# EAGLE board class ab (EAGLE 9.6.2)
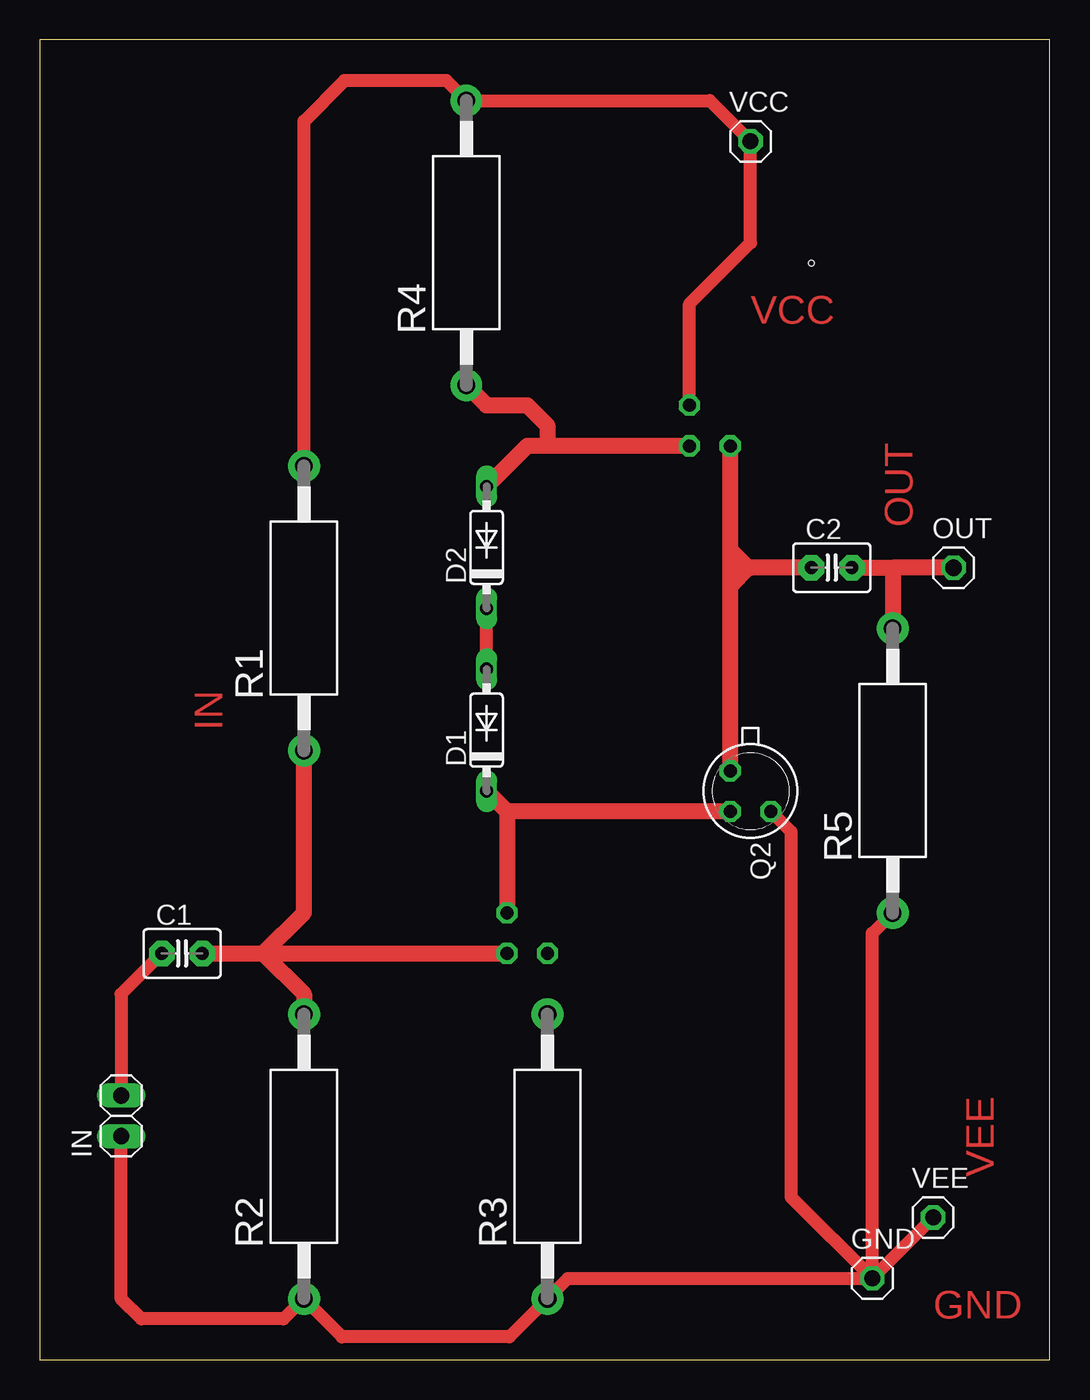
[diagram p0: board, top side]
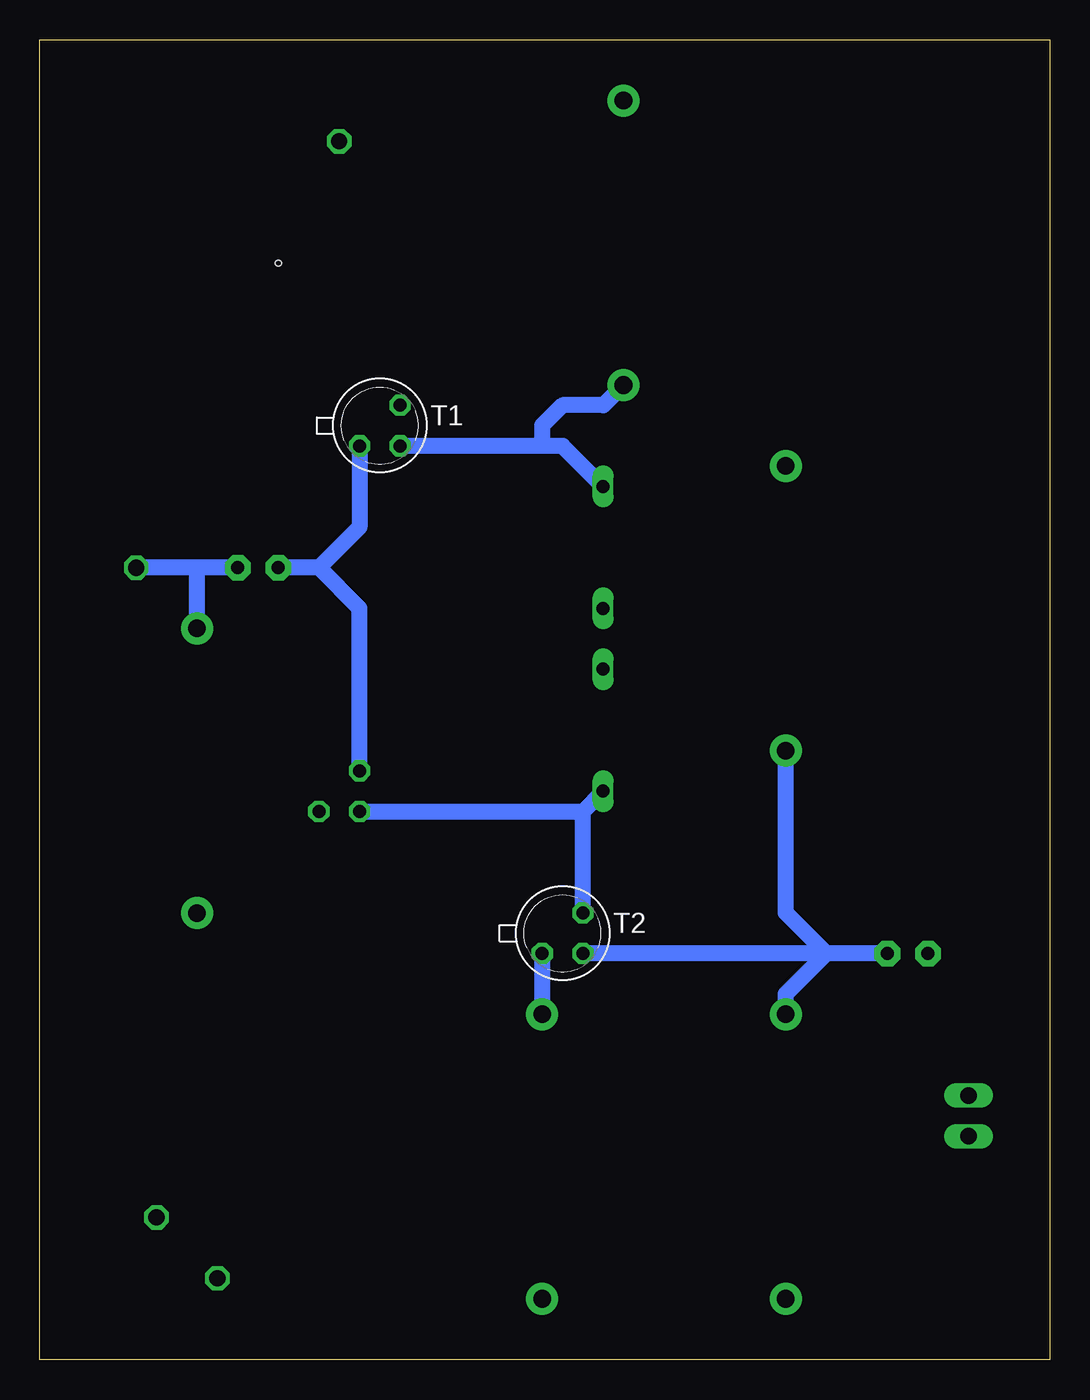
[diagram p1: board, bottom side, seen from below]

Size 63.17 x 82.54 mm. Coordinates in mm from the lower left corner, seen from the top.
Outline: 0,0 63.17,0 63.17,82.54 0,82.54 0,0
Copper layers (1*16): Top 0.035mm / dielectric 1.5mm / Bottom 0.035mm
Design rules "default": minimum track width 6mil, minimum drill 0.35mm, track to track 6mil, track to pad 6mil, pad to pad 6mil, via to via 6mil, smd to smd 6mil, copper to edge 40mil, drill to drill 6mil, minimum pad ring 10mil, minimum via ring 8mil, stop-mask expansion 4mil, vias tented up to drill 0mil, thermal gap 10mil
Holes 0.35 mm at 48.26,68.58

## Footprints (pad centres in the part's own frame; a part is rotated, then mirrored left to right if it is on the bottom)
C2.5-3 = drill 0.813 pad 1.6 octagon: 1 -1.27,0; 2 1.27,0
DO35-7 = drill 0.813 long: A 3.81,0; C -3.81,0
1X01 = drill 1.016 octagon: 1 0,0
1X02 = drill 1.016 long: 1 -1.27,0; 2 1.27,0
TO18 = drill 0.813 octagon: 1 -1.27,-1.27; 2 1.27,-1.27; 3 1.27,1.27
AC01 = drill 1.1 pad 2: 1 -8.9,0; 2 8.9,0

## Placement (x,y rotation side)
C1  [C2.5-3]  8.89,25.4 0 top
C2  [C2.5-3]  49.53,49.53 0 top
D1  1N4148DO35-7  [DO35-7]  27.94,39.37 90 top
D2  1N4148DO35-7  [DO35-7]  27.94,50.8 90 top
GND  [1X01]  52.07,5.08 0 top
IN  [1X02]  5.08,15.24 90 top
OUT  [1X01]  57.15,49.53 0 top
Q2  2N2907  [TO18]  44.45,35.56 270 top
R1  [AC01]  16.51,46.99 90 top
R2  [AC01]  16.51,12.7 90 top
R3  [AC01]  31.75,12.7 90 top
R4  [AC01]  26.67,69.85 90 top
R5  [AC01]  53.34,36.83 90 top
T1  2N2222  [TO18]  41.91,58.42 0 bottom
T2  2N2222  [TO18]  30.48,26.67 0 bottom
VCC  [1X01]  44.45,76.2 0 top
VEE  [1X01]  55.88,8.89 0 top

## Library data of the parts
C1 C2 = capacitor-wima
D1 D2 = diode
GND IN OUT VCC VEE = pinhead
Q2 = transistor-pnp
R1-R5 = resistor-power; OC_FARNELL: unknown; OC_NEWARK: unknown
T1 T2 = transistor

## Nets
GND: GND.1 IN.1 Q2.3 R2.1 R3.1 R5.1 VEE.1
N$1: C1.2 R1.1 R2.2 T2.2
N$2: D1.C Q2.2 T2.3
N$3: D1.A D2.C
N$4: D2.A R4.1 T1.2
N$5: R3.2 T2.1
N$8: C2.1 Q2.1 T1.1
N$9: C1.1 IN.2
N$10: C2.2 OUT.1 R5.2
VCC: R1.2 R4.2 T1.3 VCC.1

## Tracks (layer width: path | path; a pad name or v marks a point on that pad's centre or on a via)
GND
  Top 0.813: GND.1 VEE.1 | GND.1 52.07,26.66 R5.1 | Q2.3 46.99,33.02 46.99,10.16 GND.1 | GND.1 33.03,5.08 R3.1 29.37,1.42 18.89,1.42 R2.1 15.24,2.54 6.35,2.54 5.08,3.81 IN.1
N$1
  Top 1.016: C1.2 13.97,25.4 | 13.97,25.4 16.51,22.86 R2.2 | 13.97,25.4 16.51,27.94 R1.1 | 13.97,25.4 T2.2
  Bottom 1.016: C1.2 13.97,25.4 | 13.97,25.4 T2.2 | R1.1 16.51,27.94 13.97,25.4 | R2.2 16.51,22.86 13.97,25.4
N$2
  Top 1.016: D1.C 29.21,34.29 | 29.21,34.29 T2.3 | Q2.2 29.21,34.29
  Bottom 1.016: T2.3 29.21,34.29 | 29.21,34.29 D1.C | Q2.2 29.21,34.29
N$3
  Top 0.813: D1.A D2.C
N$4
  Top 1.016: D2.A 30.48,57.15 31.75,57.15 | T1.2 31.75,57.15 | R4.1 27.93,59.69 30.48,59.69 31.75,58.42 31.75,57.15
  Bottom 1.016: R4.1 27.93,59.69 30.48,59.69 31.75,58.42 31.75,57.15 | 31.75,57.15 T1.2 | D2.A 30.48,57.15 31.75,57.15
N$5
  Bottom 1.016: T2.1 R3.2
N$8
  Top 0.813: 43.18,48.26 44.45,49.53 43.18,50.8
  Top 1.016: Q2.1 43.18,48.26 43.18,49.53 | 43.18,49.53 43.18,50.8 T1.1 | C2.1 44.45,49.53 43.18,49.53
  Bottom 1.016: Q2.1 43.18,46.99 45.72,49.53 | 45.72,49.53 C2.1 | T1.1 43.18,52.07 45.72,49.53
N$9
  Top 0.813: C1.1 5.08,22.86 IN.2
N$10
  Top 1.016: C2.2 53.34,49.53 | 53.34,49.53 R5.2 | OUT.1 53.34,49.53
  Bottom 1.016: C2.2 53.34,49.53 | 53.34,49.53 OUT.1 | R5.2 53.34,49.53
VCC
  Top 0.813: R1.2 16.51,77.47 19.05,80.01 25.41,80.01 R4.2 41.9,78.75 VCC.1 44.45,69.85 40.64,66.04 T1.3

## Text on the board
Top: VCC | OUT | IN | VEE | GND